# Altium PCB v1_1_1.PcbDoc (part 2 of 2)
Units mil, origin at the board's own origin, x right, y up, seen from the top; angles counter-clockwise.
Board outline 6000 x 5000 mil, 4 copper layers (Top Layer, Inner Layer 1, Inner Layer 2, Bottom Layer), stack 61.811 mil thick; 59 components, 65 nets, 368 pads, 8 vias.
Unrouted connection lines stored in the file: 222.
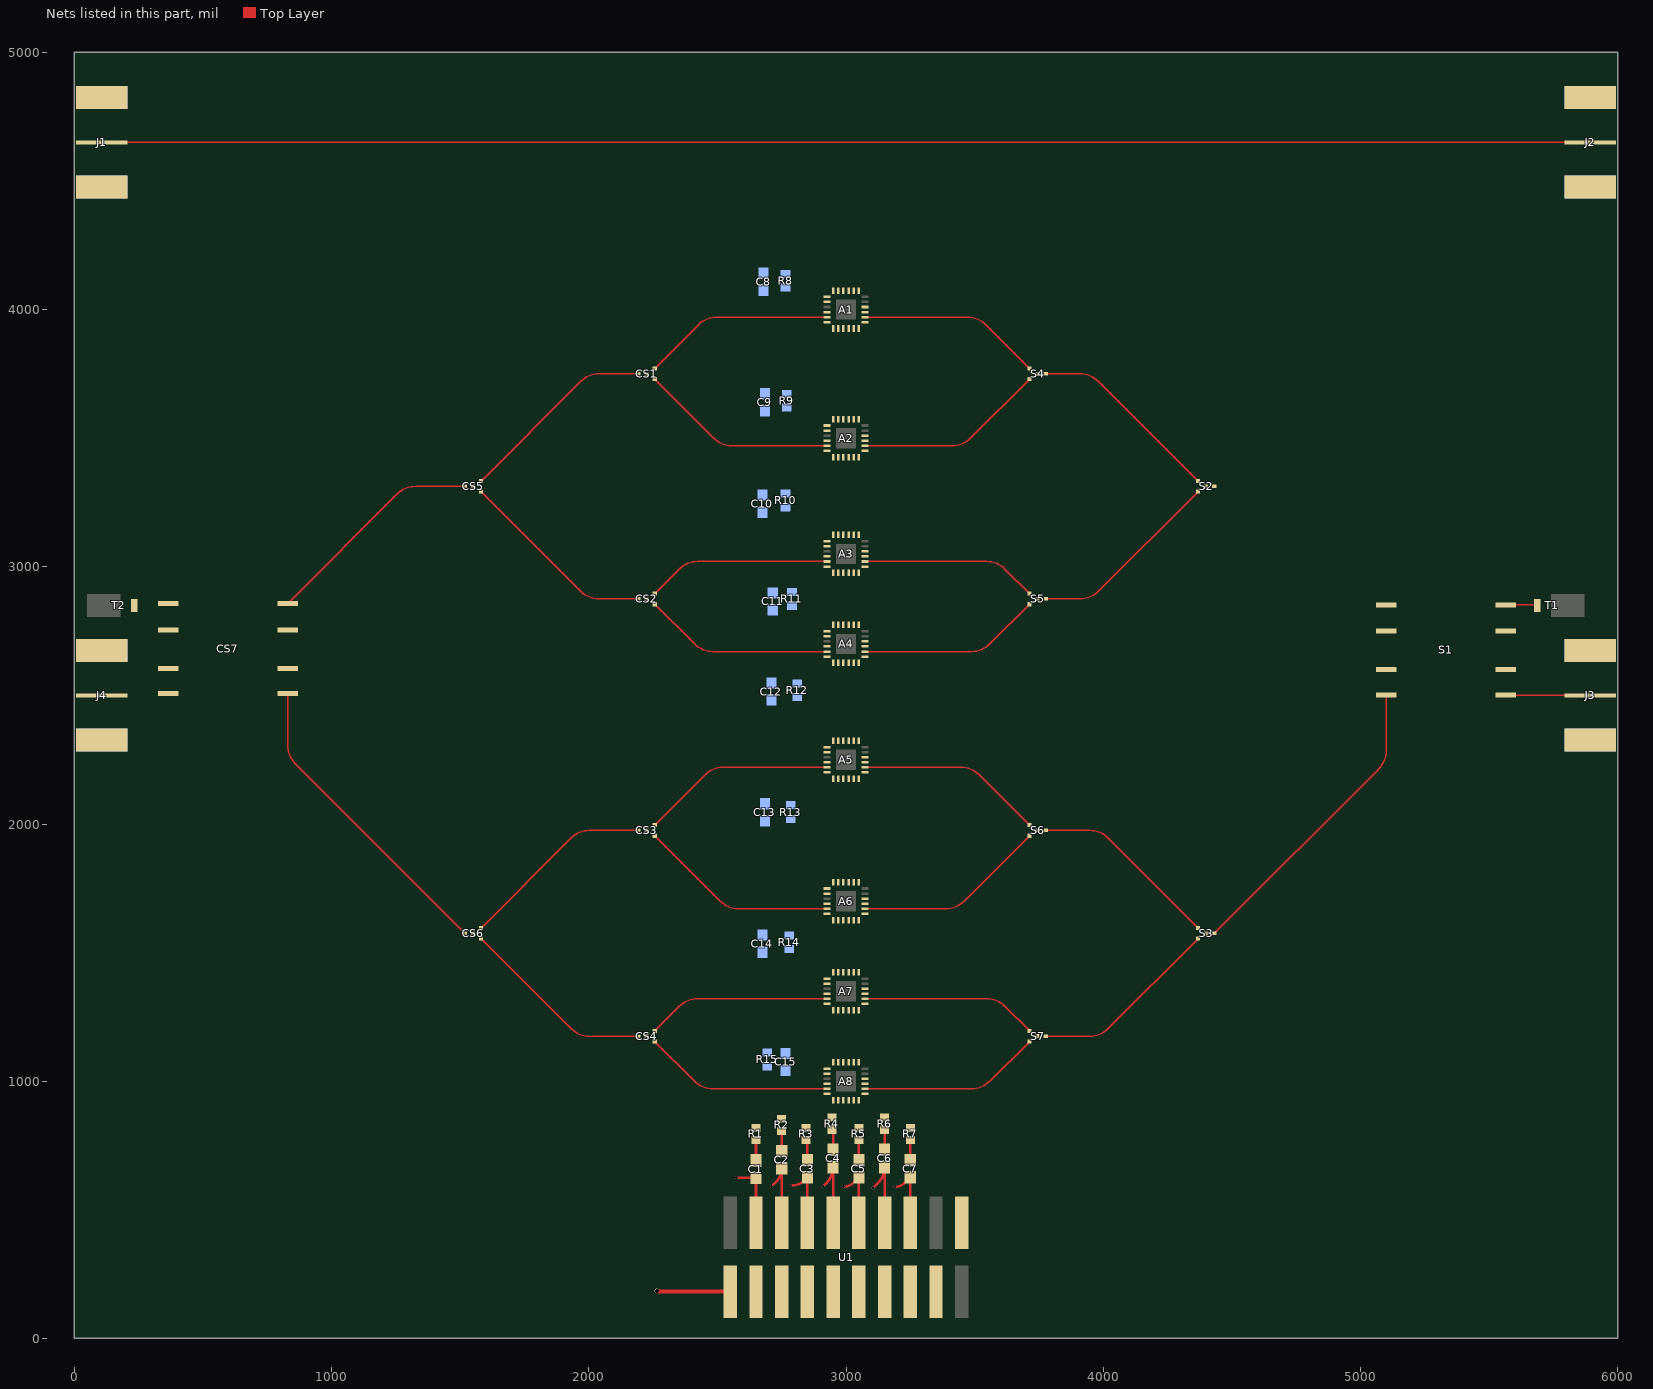
[diagram p2: the nets of this part, all layers, seen from the top]

## Part data
A1 A2 A3 A4 A5 A6 A7 A8: Package=VFQFPN-24, DeviceSetName=IDT-F1958, GateName_1=G$1, LibraryName=wcsn_parts, SymbolName_1=F1958
C1 C2 C3 C4 C5 C6 C7: library part CMP-2000-05011-1, "CAP, 100pF, 50VDC, +-5%, 0603, CERAMIC MONOLITHIC CHIP, LF", Manufacturer=AVX, Package Description="2-Pin Surface Mount Device, Body 1.6 x 0.81 mm", Package Reference=603, Datasheet URL=http://datasheet.octopart.com/06035A101JAT2A-AVX-datasheet-9883399.pdf, Datasheet Version=Nov-10, Manufacturer URL=http://www.avx.com/
C8 C9 C10 C11 C12 C13 C14 C15: library part CC0603KRX7R9BB103, "Cap Cer 10000pf 50v 10% X7r 0603 Cap Cer 10000pf 50v 10% X7r 0603 Cap Cer 10000pf 50v 10% X7r 0603", Package="0603 Yageo", Supplier Part Number 1=311-1085-1-ND, Digi-Key_Part_Number=311-1085-1-ND, Digi-Key_Purchase_URL=https://www.digikey.com/product-detail/en/yageo/CC0603KRX7R9BB103/311-1085-1-ND/302995?utm_source=snapeda&utm_medium=aggregator&utm_campaign=symbol, MF=Yageo, MP=CC0603KRX7R9BB103, SnapEDA_Link=https://www.snapeda.com/parts/CC0603KRX7R9BB103/Yageo/view-part/?ref=snap, Supplier 1=Digi-Key
CS1 CS2 CS3 CS4 CS5 CS6 S2 S3 S4 S5 S6 S7: "Power Divider 6db .25w 1206 Smd", Package="1206 Susumu", Availability=Unavailable, MF=Susumu, MP=PS3216GT2-R50-T5, Price=None, SnapEDA_Link=https://www.snapeda.com/parts/PS3216GT2-R50-T5/Susumu/view-part/?ref=snap
CS7 S1: Package=FP-2, DeviceSetName=JH-121-PIN, GateName_1=G$1, LibraryName=wcsn_parts, SymbolName_1=JH-121-PIN
  CS7: Supplier 1="Richardson RFPD", Supplier Part Number 1=JH-121-PIN
J1 J2 J3 J4: library part SMA-OSHPARK-4L-1.6MM, DeviceName=-OSHPARK-4L-1.6MM, DeviceSetName=SMA, GateName_1=G1, LibraryName=dword1511-connectors, Package=SMA-OSHPARK-4L-1.6MM, SymbolName_1=COAX
R1 R2 R3 R4 R5 R6 R7: library part CMP-2000-00870-1, Manufacturer=Panasonic, Part Number=ERA3AEB101V
R8 R9 R10 R11 R12 R13 R14 R15: library part CMP-2000-00700-1, Manufacturer=Panasonic, Part Number=ERJ-3GEY0R00V
U1: "2500 Series Low Profile SMT 4 wall Header, Straight, .100 X .100 20 Position", Package=None, Supplier Part Number 1=MSH20KCT-ND, Digi-Key_Part_Number=MSH20KCT-ND, Digi-Key_Purchase_URL=https://www.digikey.com/product-detail/en/3m/N2520-6V0C-RB-WE/MSH20KCT-ND/1125449?utm_source=snapeda&utm_medium=aggregator&utm_campaign=symbol, MF=3M, MP=N2520-6V0C-RB-WE, SnapEDA_Link=https://www.snapeda.com/parts/N2520-6V0C-RB-WE/3M%20%28TC%29/view-part/?ref=snap, Supplier 1=Digi-Key
T1: DeviceSetName=C20A50Z4, GateName_1=G$1, LibraryName=wcsn_parts, Package=C20A50Z4, Supplier 1="Richardson RFPD", Supplier Part Number 1=C20A50Z4, SymbolName_1=RF-TERMINATION
T2: DeviceSetName=C20A50Z4, GateName_1=G$1, LibraryName=wcsn_parts, Package=C20A50Z4, SymbolName_1=RF-TERMINATION

## Via types
v1: diameter 12, hole 12, Top Layer to Bottom Layer, 7 vias
v2: diameter 18, hole 16, Top Layer to Bottom Layer, 1 vias

## Nets (pads, with @x,y where several pads share a name; then routed paths per layer and width w, separated by ;. In a path a pad name is that pad's centre, name@x,y a point inside that pad or via, vN(x,y) a via of type N, cw(c..) or ccw(c..) an arc to the next point about the centre after c; other vN are vias at no path point)
C1_0_1: A1.5 CS1.3 | length 748.1
  Top Layer w5.78: CS1.3@2256.5,3770.67 2427.01,3941.18 cw(c2497.72,3870.47) 2497.72,3970.47 A1.5@2926.18,3970.47
C1_0_2: A2.5 CS1.2 | length 772.6
  Top Layer w5.78: CS1.2@2256.5,3729.33 2486.07,3499.76 ccw(c2556.78,3570.47) 2556.78,3470.47 A2.5@2926.18,3470.47
C2_0_1: A3.5 CS2.3 | length 717.1
  Top Layer w5.78: CS2.3@2256.5,2895.67 2352.01,2991.18 cw(c2422.72,2920.47) 2422.72,3020.47 A3.5@2926.18,3020.47
C2_0_2: A4.5 CS2.2 | length 741.5
  Top Layer w5.78: CS2.2@2256.5,2854.33 2411.07,2699.76 ccw(c2481.78,2770.47) 2481.78,2670.47 A4.5@2926.18,2670.47
C3_90_1: A5.5 CS3.3 | length 758.5
  Top Layer w5.78: CS3.3@2256.5,1995.67 2452.01,2191.18 cw(c2522.72,2120.47) 2522.72,2220.47 A5.5@2926.18,2220.47
C3_90_2: A6.5 CS3.2 | length 783
  Top Layer w5.78: CS3.2@2256.5,1954.33 2511.07,1699.76 ccw(c2581.78,1770.47) 2581.78,1670.47 A6.5@2926.18,1670.47
C4_90_1: A7.5 CS4.3 | length 717.1
  Top Layer w5.78: CS4.3@2256.5,1195.67 2352.01,1291.18 cw(c2422.72,1220.47) 2422.72,1320.47 A7.5@2926.18,1320.47
C4_90_2: A8.5 CS4.2 | length 741.5
  Top Layer w5.78: CS4.2@2256.5,1154.33 2411.07,999.76 ccw(c2481.78,1070.47) 2481.78,970.47 A8.5@2926.18,970.47
C5_0_1: CS1.1 CS5.3 | length 780.4
  Top Layer w5.78: CS5.3@1581.5,3333.17 1969.04,3720.71 cw(c2039.75,3650) 2039.75,3750 CS1.1@2193.5,3750
C5_0_2: CS2.1 CS5.2 | length 780.4
  Top Layer w5.78: CS5.2@1581.5,3291.83 1969.04,2904.29 ccw(c2039.75,2975) 2039.75,2875 CS2.1@2193.5,2875
C6_90_1: CS3.1 CS6.3 | length 764.8
  Top Layer w5.78: CS6.3@1581.5,1595.67 1931.54,1945.71 cw(c2002.25,1875) 2002.25,1975 CS3.1@2193.5,1975
C6_90_2: CS4.1 CS6.2 | length 764.8
  Top Layer w5.78: CS6.2@1581.5,1554.33 1931.54,1204.29 ccw(c2002.25,1275) 2002.25,1175 CS4.1@2193.5,1175
C7_0: CS5.1 CS7.8 | length 873.3
  Top Layer w5.78: CS7.8@829.57,2856.96 1255.82,3283.21 cw(c1326.53,3212.5) 1326.53,3312.5 CS5.1@1518.5,3312.5
C7_90: CS6.1 CS7.5 | length 1221.1
  Top Layer w5.78: CS7.5@829.57,2506.57 829.57,2305.36 ccw(c929.57,2305.36) 858.86,2234.64 CS6.1@1518.5,1575 1518.5,1583.5
D0: A1.1 A2.1 A3.1 A4.1 A5.1 A6.1 A7.1 A8.1 C1.2 U1.4 | length 250
  Top Layer w10: v1(2575,625) C1.2@2650,625 U1.4@2650,450
D1: A1.24 A2.24 A3.24 A4.24 A5.24 A6.24 A7.24 A8.24 C2.2 U1.6 | length 296.4
  Top Layer w10: v1(2710,590) 2727.7,607.7 ccw(c2673.87,661.54) C2.2@2750,661.54 U1.6@2750,450
D2: A1.23 A2.23 A3.23 A4.23 A5.23 A6.23 A7.23 A8.23 C3.2 U1.8 | length 251.6
  Top Layer w10: v1(2785,595) 2790,595 ccw(c2790,663.72) 2838.59,615.13 C3.2@2850,626.54 U1.8@2850,450
D3: A1.22 A2.22 A3.22 A4.22 A5.22 A6.22 A7.22 A8.22 C4.2 U1.10 | length 305.8
  Top Layer w10: v1(2910,590) 2924.17,604.17 ccw(c2861.8,666.54) C4.2@2950,666.54 U1.10@2950,450
D4: A1.21 A2.21 A3.21 A4.21 A5.21 A6.21 A7.21 A8.21 C5.2 U1.12 | length 249.2
  Top Layer w10: v1(2990,590) ccw(c2990,646.65) 3030.06,606.59 C5.2@3050,626.54 U1.12@3050,450
D5: A1.20 A2.20 A3.20 A4.20 A5.20 A6.20 A7.20 A8.20 C6.2 U1.14 | length 312.9
  Top Layer w10: v1(3105,585) 3124.17,604.17 ccw(c3061.8,666.54) C6.2@3150,666.54 U1.14@3150,450
D6: A1.19 A2.19 A3.19 A4.19 A5.19 A6.19 A7.19 A8.19 C7.2 U1.16 | length 249.2
  Top Layer w10: v1(3190,590) ccw(c3190,646.65) 3230.06,606.59 C7.2@3250,626.54 U1.16@3250,450
GND: A1.4 A1.6 A1.7 A1.8 A1.9 A1.10 A1.11 A1.12 A1.13 A1.15 A2.4 A2.6 A2.7 A2.8 A2.9 A2.10 A2.11 A2.12 A2.13 A2.15 A3.4 A3.6 A3.7 A3.8 A3.9 A3.10 A3.11 A3.12 A3.13 A3.15 A4.4 A4.6 A4.7 A4.8 A4.9 A4.10 A4.11 A4.12 A4.13 A4.15 A5.4 A5.6 A5.7 A5.8 A5.9 A5.10 A5.11 A5.12 A5.13 A5.15 A6.4 A6.6 A6.7 A6.8 A6.9 A6.10 A6.11 A6.12 A6.13 A6.15 A7.4 A7.6 A7.7 A7.8 A7.9 A7.10 A7.11 A7.12 A7.13 A7.15 A8.4 A8.6 A8.7 A8.8 A8.9 A8.10 A8.11 A8.12 A8.13 A8.15 C8.2 C9.2 C10.2 C11.2 C12.2 C13.2 C14.2 C15.2 CS1.G CS2.G CS3.G CS4.G CS5.G CS6.G CS7.2 CS7.3 CS7.6 CS7.7 J1.GND J2.GND J3.GND J4.GND R1.2 R2.2 R3.2 R4.2 R5.2 R6.2 R7.2 S1.2 S1.3 S1.6 S1.7 S2.G S3.G S4.G S5.G S6.G S7.G U1.20
LE1: A1.16 U1.3
LE2: A2.16 U1.5
LE3: A3.16 U1.7
LE4: A4.16 U1.9
LE5: A5.16 U1.11
LE6: A6.16 U1.13
LE7: A7.16 U1.15
LE8: A8.16 U1.17
NetA1_2: A1.2 C8.1 R8.2
NetA2_2: A2.2 C9.1 R9.2
NetA3_2: A3.2 C10.1 R10.2
NetA4_2: A4.2 C11.1 R11.2
NetA5_2: A5.2 C12.1 R12.2
NetA6_2: A6.2 C13.1 R13.2
NetA7_2: A7.2 C14.1 R14.2
NetA8_2: A8.2 C15.1 R15.2
NetC1_1: C1.1 R1.1 | length 79.4
  Top Layer w10: C1.1@2650,691.93 R1.1@2650,771.38
NetC2_1: C2.1 R2.1 | length 77.9
  Top Layer w10: C2.1@2750,728.46 R2.1@2750,806.38
NetC3_1: C3.1 R3.1 | length 80
  Top Layer w10: R3.1@2845,771.38 2850,766.38 C3.1@2850,693.46
NetC4_1: C4.1 R4.1 | length 86.3
  Top Layer w10: C4.1@2950,733.46 2950,799.31 ccw(c2932.93,799.31) R4.1@2945,811.38 R4.1@2950,806.38
NetC5_1: C5.1 R5.1 | length 77.9
  Top Layer w10: C5.1@3050,693.46 R5.1@3050,771.38
NetC6_1: C6.1 R6.1 | length 77.9
  Top Layer w10: C6.1@3150,733.46 R6.1@3150,811.38
NetC7_1: C7.1 R7.1 | length 77.9
  Top Layer w10: C7.1@3250,693.46 R7.1@3250,771.38
NetCS7_4: CS7.4 T2.T
NetS1_8: S1.8 T1.T | length 123.7
  Top Layer w5.78: S1.8@5564.57,2851.96 5685.54,2851.96 T1.T@5687.5,2850
RF2: J1.SIG J2.SIG | length 5788
  Top Layer w5.78: J1.SIG@106,4650 J2.SIG@5894,4650
RF-IN: J3.SIG S1.5 | length 330.1
  Top Layer w5.78: S1.5@5564.57,2501.57 5566.14,2500 J3.SIG@5894,2500
RF-OUT: CS7.1 J4.SIG
S1_0: S1.4 S2.1
S1_90: S1.1 S3.1 | length 1199.6
  Top Layer w5.78: S3.1@4431.5,1575 4432.48,1575 5070.11,2212.63 cw(c5075.66,2211) 5071.55,2215.06 ccw(c5000,2284.93) 5100,2284.93 S1.1@5100,2501.57
S2_0_1: S2.2 S4.1 | length 760.4
  Top Layer w5.78: S4.1@3776.5,3750 3910.25,3750 cw(c3910.25,3650) 3980.96,3720.71 S2.2@4368.5,3333.17
S2_0_2: S2.3 S5.1 | length 760.4
  Top Layer w5.78: S5.1@3776.5,2875 3910.25,2875 ccw(c3910.25,2975) 3980.96,2904.29 S2.3@4368.5,3291.83
S3_90_1: S3.2 S6.1 | length 744.8
  Top Layer w5.78: S6.1@3776.5,1975 3947.75,1975 cw(c3947.75,1875) 4018.46,1945.71 S3.2@4368.5,1595.67
S3_90_2: S3.3 S7.1 | length 744.8
  Top Layer w5.78: S7.1@3776.5,1175 3947.75,1175 ccw(c3947.75,1275) 4018.46,1204.29 S3.3@4368.5,1554.33
S4_0_1: A1.14 S4.2 | length 718.1
  Top Layer w5.78: A1.14@3073.82,3970.47 3472.28,3970.47 cw(c3472.28,3870.47) 3542.99,3941.18 S4.2@3713.5,3770.67
S4_0_2: A2.14 S4.3 | length 742.6
  Top Layer w5.78: A2.14@3073.82,3470.47 3413.22,3470.47 ccw(c3413.22,3570.47) 3483.93,3499.76 S4.3@3713.5,3729.33
S5_0_1: A3.14 S5.2 | length 687.1
  Top Layer w5.78: A3.14@3073.82,3020.47 3547.28,3020.47 cw(c3547.28,2920.47) 3617.99,2991.18 S5.2@3713.5,2895.67
S5_0_2: A4.14 S5.3 | length 711.5
  Top Layer w5.78: A4.14@3073.82,2670.47 3488.22,2670.47 ccw(c3488.22,2770.47) 3558.93,2699.76 S5.3@3713.5,2854.33
S6_90_1: A5.14 S6.2 | length 728.5
  Top Layer w5.78: A5.14@3073.82,2220.47 3447.28,2220.47 cw(c3447.28,2120.47) 3517.99,2191.18 S6.2@3713.5,1995.67
S6_90_2: A6.14 S6.3 | length 753
  Top Layer w5.78: A6.14@3073.82,1670.47 3388.22,1670.47 ccw(c3388.22,1770.47) 3458.93,1699.76 S6.3@3713.5,1954.33
S7_90_1: A7.14 S7.2 | length 687.1
  Top Layer w5.78: A7.14@3073.82,1320.47 3547.28,1320.47 cw(c3547.28,1220.47) 3617.99,1291.18 S7.2@3713.5,1195.67
S7_90_2: A8.14 S7.3 | length 711.5
  Top Layer w5.78: A8.14@3073.82,970.47 3488.22,970.47 ccw(c3488.22,1070.47) 3558.93,999.76 S7.3@3713.5,1154.33
VDD: R8.1 R9.1 R10.1 R11.1 R12.1 R13.1 R14.1 R15.1 U1.1 | length 285.8
  Top Layer w16: v2(2265,185) ccw(c2272.24,192.24) 2272.24,182 U1.1@2550,182
pads on no net: A1.0 A1.3 A1.17 A1.18 A2.0 A2.3 A2.17 A2.18 A3.0 A3.3 A3.17 A3.18 A4.0 A4.3 A4.17 A4.18 A5.0 A5.3 A5.17 A5.18 A6.0 A6.3 A6.17 A6.18 A7.0 A7.3 A7.17 A7.18 A8.0 A8.3 A8.17 A8.18 T1.50 T2.50 U1.2 U1.18 U1.19
copper on no net: | length 854.1
  Top Layer w10: 4431.5,3312.5 4856.68,2887.32 ccw(c4942.04,2972.67) 4942.04,2851.96 5100,2851.96

## Polygon pours and split planes (outlines as drawn)
GND on Inner Layer 1 "GND-Inner2" (solid, pour order 0): 0,5000 6000,5000 6000,0 0,0
GND on Bottom Layer "GND-Bottom" (solid, pour order 2): 0,5000 6000,5000 6000,0 0,0
GND on Top Layer "GND-Top" (solid, pour order 3): 0,5000 6000,5000 6000,0 0,0
VDD on Inner Layer 2 "VDD-Inner3" (solid, pour order 4): 0,5000 6000,5000 6000,0 0,0

## Text inside footprints (layer, text, board x,y; h text height)
U1: Top Overlay "19" at 3664.66,147 h73.82; Top Overlay "20" at 3664.28,415.2 h73.82; Top Overlay "1" at 2289.68,146.86 h73.82; Top Overlay "2" at 2290.73,415.2 h73.82; Mechanical 4 "19" at 3665.32,146.84 h73.82; Mechanical 4 "20" at 3665.04,415.33 h73.82; Mechanical 4 "1" at 2290.24,146.99 h73.82; Mechanical 4 "2" at 2290.72,415.2 h73.82; Mechanical 4 "19" at 3665.32,146.84 h73.82; Mechanical 4 "20" at 3665.04,415.33 h73.82; Mechanical 4 "1" at 2290.24,146.99 h73.82; Mechanical 4 "2" at 2290.72,415.2 h73.82